# Altium PCB PCB2.PcbDoc
Units mil, origin at the board's own origin, x right, y up, seen from the top; angles counter-clockwise.
Board outline 3825 x 1535 mil, 2 copper layers (Top Layer, Bottom Layer); 16 components, 19 nets, 67 pads, 37 vias.
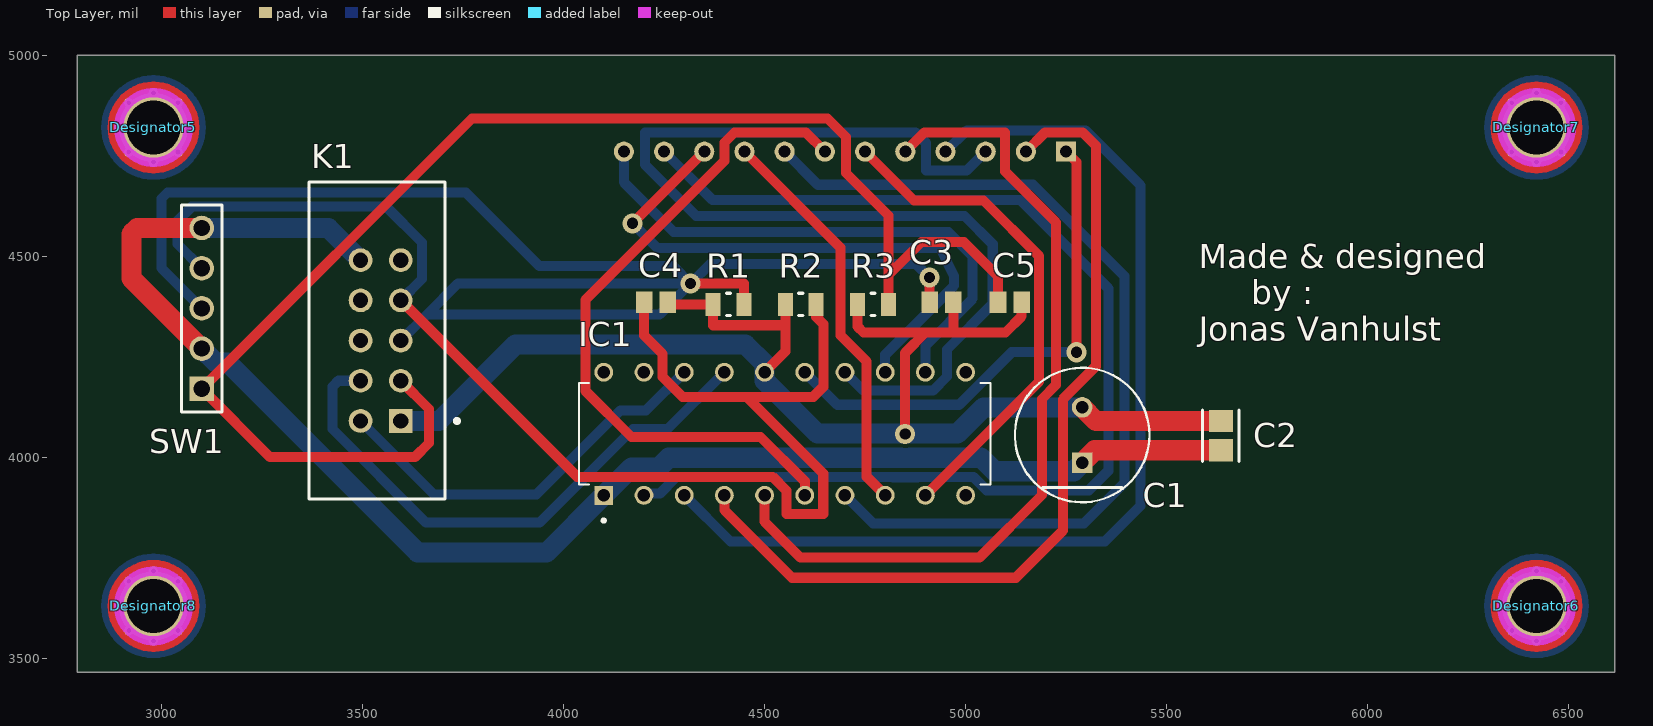
[diagram p0: Top Layer view]
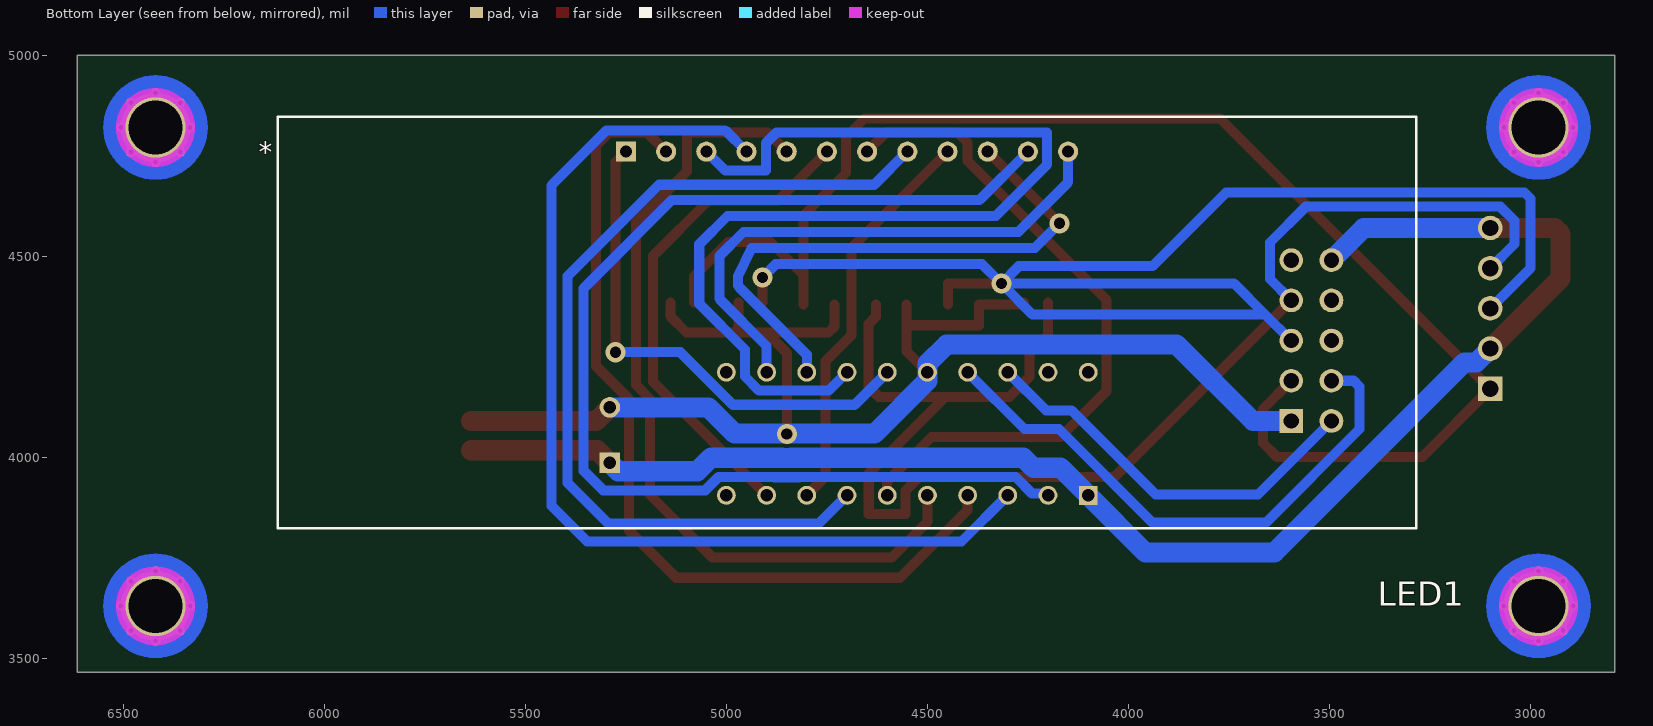
[diagram p1: Bottom Layer view, seen from below]
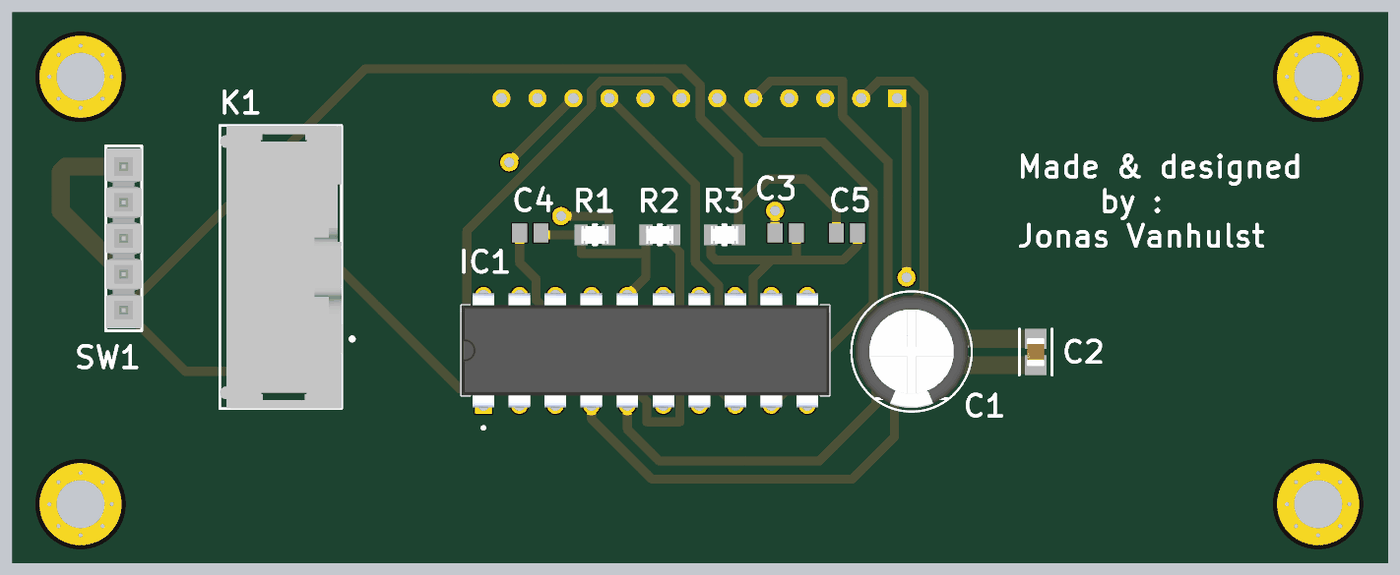
[diagram p2: 3D render of the assembled board from above, using the file's embedded part models]

## Layer stack, top to bottom
Top Solder: solder mask 0.4, Solder Resist, Dk 3.5
Top Layer: signal copper 1.4
Dielectric 1: dielectric 12.6, FR-4, Dk 4.8
Bottom Layer: signal copper 1.4
Bottom Solder: solder mask 0.4, Solder Resist, Dk 3.5

## Board outline
2790,3465 6615,3465 6615,5000 2790,5000

## Design rules (kind name [scope] priority, off if disabled: settings)
Clearance [All] p1: gap=10 ignorepadtopadclearanceinfootprint=FALSE except(0: Arc-Hole Track-Hole SMDPad-Hole THPad-Hole Via-Hole Fill-Hole Poly-Hole Region-Hole Text-Hole)
PolygonConnect [All] p1: connectstyle=Relief reliefconductorwidth=10 reliefentries=4 polygonreliefangle="90 Angle" airgapwidth=10
RoutingVias [All] p1: holewidth=28 width=50 viastyle="Through Hole" minholewidth=28 minwidth=50 maxholewidth=28 maxwidth=50
SolderMaskExpansion [All] p1: expansion=4 istentingtop=FALSE
Width [All] p1: maxlimit=50 minlimit=25 preferedwidth=25 minimp=50.000000 maximp=50.000000 favimp=50.000000
30 further rules are at their usual default settings.

## Classes and differential pairs
component class Display: C1 C2 C3 C4 C5 IC1 K1 LED1 R1 R2 R3 SW1

## Components (designator, comment, footprint, x,y, rotation, side; value= is the part's Value field where it differs from the comment)
C1 "100µF" "Cap 50V 100µF 8X11" 5290,4055 r90 top
C2 "100nF" "cap 50V 100nF A" 5635,4053.53 r270 top
C3 "10nF" "cap 10nF X7R 50V LL" 4940,4385 r0 top
C4 "10nF" "cap 10nF X7R 50V LL" 4230,4385 r0 top
C5 "10nF" "cap 10nF X7R 50V LL" 5110,4385 r0 top
Designator5 "Comment" Mounting-Hole-RND-Altium 2980,4820 r0 top
Designator6 "Comment" Mounting-Hole-RND-Altium 6420,3630 r0 top
Designator7 "Comment" Mounting-Hole-RND-Altium 6420,4820 r0 top
Designator8 "Comment" Mounting-Hole-RND-Altium 2980,3630 r0 top
IC1 "TM1637" TM1637 4550,4058.15 r90 top
K1 "N2510-6002RB" boxheader 3545,4290 r90 top
LED1 "KW4-801AVB" KW4801AVB 5250,4760 r180 bottom
R1 "10K" "Weerstand 10k ohm" 4410,4380 r0 top
R2 "10K" "Weerstand 10k ohm" 4590,4380 r0 top
R3 "10K" "Weerstand 10k ohm" 4770,4380 r0 top
SW1 "PEC11R-4225F-S0024" "Pinheader (1rij-5pin)" 3100,4170 r90 top

## Footprints (in the part's own frame and the unit in brackets; to place one, negate y for a bottom-side part, rotate by r counter-clockwise, add the part's x,y. Pads: shape width x height; smd on the part's side, far side on the other; paste and mask are expansions set on the pad)
boxheader [mm] "Header, 10-Leads, Body 20.02x8.59mm, Pitch 2.54mm"
  rect 1.5x1.5 hole 0.97: 1(-5.08,-1.27)
  round 1.5 hole 0.97: 2(-5.08,1.27) 3(-2.54,-1.27) 4(-2.54,1.27) 5(0,-1.27) 6(0,1.27) 7(2.54,-1.27) 8(2.54,1.27) 9(5.08,-1.27) 10(5.08,1.27)
  silkscreen extent -10.01,-4.95 10.01,4.52, body extent -10.01,-4.11 10.01,4.52, height 9.92
"cap 10nF X7R 50V LL" [mm] "Chip Capacitor, 2-Leads, Body 2.00x1.25mm, IPC High Density"
  rect 1.05x1.35 smd: 1(-0.75,0) 2(0.75,0)
  body extent -1.08,-0.7 1.07,0.7, height 1.35
"cap 50V 100nF A" [mil]
  rect 55.34x59.38 smd paste+0 mask+0: 1(-36.47,0) 2(36.47,0)
  silkscreen extent -64,-45 64,45, body extent -84,-49 84,49, height 10
"Cap 50V 100µF 8X11" [mm]
  rect 1.3x1.3 hole 0.8 paste-1000 mask+0: 1(-1.75,0)
  round 1.3 hole 0.8 paste-1000 mask+0: 2(1.75,0)
  silkscreen extent -4.25,-4.25 4.25,4.25, body extent -4.35,-4.35 4.35,4.35, height 0.25
KW4801AVB [mil]
  rect 50x50 hole 30 mask+0: 1(0,0)
  round 50 hole 30 mask+0: 2(100,0) 3(200,0) 4(300,0) 5(400,0) 6(500,0) 7(600,0) 8(700,0) 9(800,0) 10(900,0) 11(1000,0) 12(1100,0)
  silkscreen extent -866,-937 1966,86, body extent 0,0 10,10, height 10
Mounting-Hole-RND-Altium [mm] "Mounting Hole, Altium, 4.4mm pad, 3.4mm plated hole"
  round 4.4 hole 3.4 mask+0.038: MOUNT(0,0)
  Top Layer circle w1: c0,0 r2.4
  Bottom Layer circle w1.2: c0,0 r2.702
  Keep-Out Layer circle w0.6: c0,0 r2.2
"Pinheader (1rij-5pin)" [mm] ".025 SQ Post Terminal Strip Assembly, 1x5 Pins, Vertical, 2.54mm Pitch, Male"
  rect 1.55x1.55 hole 1.02: 1(0,0)
  round 1.55 hole 1.02: 2(2.54,0) 3(5.08,0) 4(7.62,0) 5(10.16,0)
  silkscreen extent -1.46,-1.27 11.62,1.27, body extent -1.27,-1.27 11.43,1.27, height 5.21
TM1637 [mm]
  rect 1.19x1.19 hole 0.79: 1(-3.89,11.43)
  round 1.19 hole 0.79: 2(-3.89,8.89) 3(-3.89,6.35) 4(-3.89,3.81) 5(-3.89,1.27) 6(-3.89,-1.27) 7(-3.89,-3.81) 8(-3.89,-6.35) 9(-3.89,-8.89) 10(-3.89,-11.43) 11(3.89,-11.43) 12(3.89,-8.89) 13(3.89,-6.35) 14(3.89,-3.81) 15(3.89,-1.27) 16(3.89,1.27) 17(3.89,3.81) 18(3.89,6.35) 19(3.89,8.89) 20(3.89,11.43)
  silkscreen extent -5.58,-13 3.2,13, body extent -4.03,-13 4.03,13, height 4.31
"Weerstand 10k ohm" [mm]
  rect 0.95x1.45 smd paste+0 mask+0: 1(-0.975,0) 2(0.975,0)
  silkscreen extent -0.13,-0.7 0.13,0.7, body extent -1.55,-0.82 1.55,0.82, height 0.25

## Part data
C1: library part "Cap 50V 100µF 8x11", "Aluminum Electrolytic Capacitors (Radial Lead Type) AEC-Q200 Qualified 100uF ±20% 50V", Capacitance=100uF, Case/Package=Radial, Max Operating Temperature=105°C, Min Operating Temperature=-55°C, Package Quantity=200, Ripple Current=180mA, Tolerance=20%, Voltage=50V, Construction=RADIAL, Diameter=8mm, Height=11.5mm, Height - Seated (Max)=0.512inch, Lead Diameter=0.6mm, Lead Pitch=3.5mm, Lead/Base Style=Straight, Length=11.5mm, Life (Hours)=1000Hour, Mount="Through Hole", Number of Pins=2, Packaging=Bulk, Polarity=Polar, REACH SVHC="No SVHC", Ripple Current (AC)=180mA, RoHS Compliant=Yes, Series=HD, Termination=Radial, Voltage Rating=50V, Voltage Rating (DC)=50V
C2: library part "cap 50V 100nF", "Chip Multilayer Ceramic Capacitors for Automotive, 0805, 0.10uF, X7R, 15%, 10%, 50V, Grade 1", Case Code (Imperial)=0805, Case Code (Metric)=2012, Dielectric=X7R, Max Operating Temperature=125°C, Min Operating Temperature=-55°C, Package Quantity=3000, Ratings=AEC-Q200, Tolerance=10%, Voltage Rating=50V, Capacitance=100nF, Case/Package=0805, Depth=1.25mm, Height=1.25mm, Length=2mm, Mount="Surface Mount", Packaging="Tape and Reel", Termination=SMD/SMT, Thickness=0.049inch, Voltage Rating (DC)=50V, Weight=0.000335oz, Width=0.049inch
C3 C4 C5: library part "cap 10nF X7R 50V", Manufacturer=Vitramon, Part Number=VJ0805Y103KXACW1BC
IC1: "LED Drive Control Special Circuit", Package=Package, Availability="Not in stock", Check_prices=https://www.snapeda.com/parts/TM1637/Titan+Micro+Electronics/view-part/?ref=eda, MF="Titan Micro Electronics", MP=TM1637, Price=None, SnapEDA_Link=https://www.snapeda.com/parts/TM1637/Titan+Micro+Electronics/view-part/?ref=snap
K1: library part boxheader, "Male Header, Pitch 2.54 mm, 2 x 5 Postion, Height 9.91 mm, Tail Length 2.84 mm, -55 to 105 degC, RoHS, Bulk", Manufacturer=3M, Package Description="10-Pin Through Hole Device, Body 20.02 x 8.59 mm, Pitch 2.54 mm", Package Reference=N2510-6002-10, Package Version="Rev. M, 08/2014", PartNumber=N2510, Contact Plating=GoldOverNickel, Datasheet URL=https://datasheet.ciiva.com/11746/0900766b807b18da-11746957.pdf, Datasheet Version=05/2007, Gender=Male, Manufacturer URL=http://www.3m.com/, Mounting Technology=ThroughHole, No. of Positions=10, No. of Rows=2, Number of Contacts=10, Number of Rows=2, Orientation=Straight, Package URL=http://multimedia.3m.com/mws/media/330367O/3mtm-100-in-4-wall-hdr-rohs-lp-straightra-hitemp-ts0770.pdf, Packaging=Rail/Tube, Pitch=2.54mm, Rad Hard=No, Termination Method=Solder, Type=ShroudedHeader
LED1: "No Description Available", Mfr_Name="Luckylight Electronics", Copyright="Copyright (C) 2023 Ultra Librarian. All rights reserved.", Manufacturer_Part_Number=KW4-801AVB, RefDes=RefDes, Type=DEV
R1 R2 R3: library part "Weerstand 10K ohm", "RES Thick Film, 10kΩ, 1%, 0.125W, 100ppm/°C, 0805", Case Code (Imperial)=0805, Case Code (Metric)=2012, Max Operating Temperature=155°C, Min Operating Temperature=-55°C, Package Quantity=5000, Power Rating=125mW, Resistance=10kR, Temperature Coefficient=100ppm/°C, Tolerance=1%, Voltage Rating=150V, Case/Package=0805, Composition="Thick Film", Contact Plating=Tin, Depth=1.25mm, Height=0.45mm, Lead Free="Lead Free", Length=2mm, Military Standard=Not, Packaging="Tape and Reel", Radiation Hardening=No, Termination=SMD/SMT, Voltage Rating (DC)=150V, Weight=0.000194oz, Width=1.25mm
SW1: "No Description Available", Mfr_Name="Bourns Electronics", Copyright="Copyright (C) 2023 Ultra Librarian. All rights reserved.", Manufacturer_Part_Number=PEC11R-4225F-S0024, RefDes=RefDes, Type=DEV

## Via types
v1: diameter 23.62, hole 11.81, Top Layer to Bottom Layer, 32 vias
v2: diameter 50, hole 28, Top Layer to Bottom Layer, 5 vias

## Nets (pads, with @x,y where several pads share a name; then routed paths per layer and width w, separated by ;. In a path a pad name is that pad's centre, name@x,y a point inside that pad or via, vN(x,y) a via of type N, cw(c..) or ccw(c..) an arc to the next point about the centre after c; other vN are vias at no path point)
+5V: C1.2 C2.1 C3.2 C4.2 C5.2 IC1.16 K1.1 R1.1 R2.1 R3.1 | length 3686.2
  Top Layer w25: C4.2 4259.53,4380 R1.1 4371.61,4328 4551.61,4328 ; IC1.16 4551.61,4262.91 4551.61,4328 ; R2.1 4551.61,4328 ; R3.1 4731.61,4324.64 4746.26,4310 4900,4310 ; v2(4849.57,4057.43) 4849.57,4259.57 4900,4310 ; C3.2 4969.53,4310 ; C5.2 5139.53,4350.57 5098.96,4310 4969.53,4310 ; 4900,4310 4969.53,4310
  Top Layer w50: C1.2 5323.9,4090 C2.1
  Bottom Layer w50: K1.1 3690,4090 3880,4280 4452.6,4280 4500,4232.6 IC1.16 4500,4190 4631.57,4058.43 4849.57,4058.43 v2(4849.57,4057.43) 4850.56,4058.43 4979.25,4058.43 5044.72,4123.9 C1.2
GND: C1.1 C2.2 IC1.1 K1.10 SW1.2 SW1.5 | length 3845.9
  Top Layer w50: SW1.2 2925,4445 2925,4555.36 2939.64,4570 SW1.5 ; C1.1 5320.97,4017.07 C2.2
  Bottom Layer w50: SW1.2 3100.31,4270 3134.8,4235.51 3164.49,4235.51 3637.1,3762.9 3957.9,3762.9 IC1.1 4168.6,3973.6 4236.48,3973.6 4261.3,3998.43 4838.7,3998.43 4839.69,3997.43 4860.31,3997.43 4861.3,3998.43 5038.7,3998.43 5072.12,3965 5268.9,3965 C1.1 ; SW1.5 3415,4570 K1.10
NetC3_1: C3.1 K1.5 R1.2 SW1.3 | length 4072.6
  Top Layer w25: v2(4316,4432) 4448.39,4432 R1.2 ; C3.1 v2(4910.47,4447)
  Bottom Layer w25: SW1.3 3000,4470 3000,4643.37 3014.64,4658.01 3756.99,4658.01 3940,4475 4273,4475 v2(4316,4432) ; K1.5 3660,4355 ; v2(4910.47,4447) 4877.47,4480 4364,4480 v2(4316,4432) ; 3660,4355 3737,4432 v2(4316,4432) ; 3660,4355 4239,4355 v2(4316,4432)
NetC4_1: C4.1 K1.7 R2.2 SW1.4 | length 3490.2
  Top Layer w25: K1.7 4034.07,3950.93 4520.07,3950.93 4554,3917 4554,3859.07 4645.93,3859.07 4645.93,3959.07 4455,4150 ; C4.1 4200.47,4302.53 4246,4257 4246,4200 4296,4150 4455,4150 ; R2.2 4628.39,4349 4646,4331.39 4646,4175 4621,4150 4455,4150
  Bottom Layer w25: SW1.4 3040,4530 3040,4588.01 3075,4623.01 3558.99,4623.01 3648,4534 3648,4443 K1.7
NetC5_1: C5.1 K1.3 R3.2 SW1.1 | length 3600.7
  Top Layer w25: K1.3 3665,4120 3665,4035 3630,4000 3270,4000 SW1.1 3772.5,4842.5 4656.5,4842.5 4702.5,4796.5 4702.5,4707 4808.39,4601.11 4808.39,4452.89 ; R3.2 4808.39,4452.89 ; C5.1 5080.47,4450 4995.47,4535 4890.5,4535 4808.39,4452.89
NetIC1_2: IC1.2 LED1.11 | length 2908.6
  Bottom Layer w25: IC1.2 4204.18,3909.18 4239.23,3909.18 4280.98,3950.93 4819.02,3950.93 4820.02,3949.93 4879.98,3949.93 4880.98,3950.93 5019.02,3950.93 5052.45,3917.5 5306.5,3917.5 5355,3966 5355,4420 5135,4640 4370,4640 LED1.11
NetIC1_3: IC1.3 LED1.4 | length 2580.3
  Bottom Layer w25: IC1.3 4415,3790 5346.2,3790 5435,3878.8 5435,4676 5298,4813 5003,4813 LED1.4
NetIC1_4: IC1.4 LED1.2 | length 2196.5
  Top Layer w25: IC1.4 4400,3868 4568,3700 5124.91,3700 5241.91,3817 5241.91,4143.82 5324,4225.91 5324,4775 5291,4808 5198,4808 LED1.2
NetIC1_5: IC1.5 LED1.5 | length 2094.1
  Top Layer w25: IC1.5 4500,3839.55 4589.55,3750 5034,3750 5190,3906 5190,4144.88 5225,4179.88 5225,4584 5098,4711 5098,4808 4898,4808 LED1.5
NetIC1_6: IC1.6 LED1.7 | length 1715.1
  Top Layer w25: IC1.6 4600,3940.09 4490.09,4050 4169,4050 4054,4165 4054,4391 4400,4737 4400,4782.5 4425,4807.5 4602.5,4807.5 LED1.7
NetIC1_7: IC1.7 LED1.8 | length 2253.2
  Bottom Layer w25: LED1.8 4632.5,4677.5 5167.5,4677.5 5395,4450 5395,3936 5294,3835 4770,3835 IC1.7
NetIC1_8: IC1.8 LED1.9 | length 1000
  Top Layer w25: LED1.9 4689,4521 4689,4303.12 4754,4238.12 4754,3951 IC1.8
NetIC1_9: IC1.9 LED1.6 | length 1252.9
  Top Layer w25: LED1.6 4871.58,4638.42 5044.58,4638.42 5183,4500 5183,4188 IC1.9
NetIC1_12: IC1.12 LED1.12 | length 1357.1
  Bottom Layer w25: LED1.12 4150,4684 4274,4560 4957.5,4560 5017.5,4500 5017.5,4394.25 4900,4276.75 IC1.12
NetIC1_13: IC1.13 LED1.10 | length 1431.5
  Top Layer w25: v2(4171.5,4581.5) LED1.10
  Bottom Layer w25: v2(4171.5,4581.5) 4233,4520 4937.68,4520 4971.43,4450.14 4971.43,4426.43 4966.59,4421.59 4800,4255 IC1.13
NetIC1_14: IC1.14 LED1.3 | length 2638.8
  Bottom Layer w25: IC1.14 4745.93,4165.37 4919.02,4165.37 4954,4200.35 4954,4268 5067.5,4381.5 5067.5,4529.5 4997,4600 4330,4600 4202,4728 4202,4808 4875,4808 4902,4781 4902,4712.5 5002.5,4712.5 LED1.3
NetIC1_15: IC1.15 LED1.1 | length 1273.4
  Top Layer w25: LED1.1 5276,4734 v2(5276,4261)
  Bottom Layer w25: IC1.15 4680.93,4130.37 4984.02,4130.37 5114.65,4261 v2(5276,4261)
NetIC1_17: IC1.17 K1.4 | length 1408
  Bottom Layer w25: K1.4 3439.64,4190 3425,4175.36 3425,4070 3658,3837 3940,3837 4173,4070 4258.7,4070 IC1.17
NetIC1_18: IC1.18 K1.2 | length 1006.8
  Bottom Layer w25: K1.2 3678,3907 3932,3907 4141.52,4116.52 4205.22,4116.52 IC1.18
pads on no net: Designator5.MOUNT Designator6.MOUNT Designator7.MOUNT Designator8.MOUNT IC1.10 IC1.11 IC1.19 IC1.20 K1.6 K1.8 K1.9
copper on no net:
  other v1: 2980,3543.39 6420,3543.39 2918.75,3568.75 3041.25,3568.75 6358.75,3568.75 6481.25,3568.75 2893.39,3630 3066.61,3630 6333.39,3630 6506.61,3630 2918.75,3691.25 3041.25,3691.25 6358.75,3691.25 6481.25,3691.25 2980,3716.61 6420,3716.61 2980,4733.39 6420,4733.39 2918.75,4758.75 3041.25,4758.75 6358.75,4758.75 6481.25,4758.75 2893.39,4820 3066.61,4820 6333.39,4820 6506.61,4820 2918.75,4881.25 3041.25,4881.25 6358.75,4881.25 6481.25,4881.25 2980,4906.61 6420,4906.61

## Silkscreen, mask and mechanical layers (free items; w line width, h text height)
Top Overlay:
  text "Made & designed /      by : / Jonas Vanhulst" at 5580,4290 h60

## Text inside footprints (layer, text, board x,y; h text height)
LED1: Mechanical 13 "*" at 6113,4735 h50; Bottom Overlay "*" at 6163,4735 h50